# EAGLE board untitled (EAGLE 9.6.2)
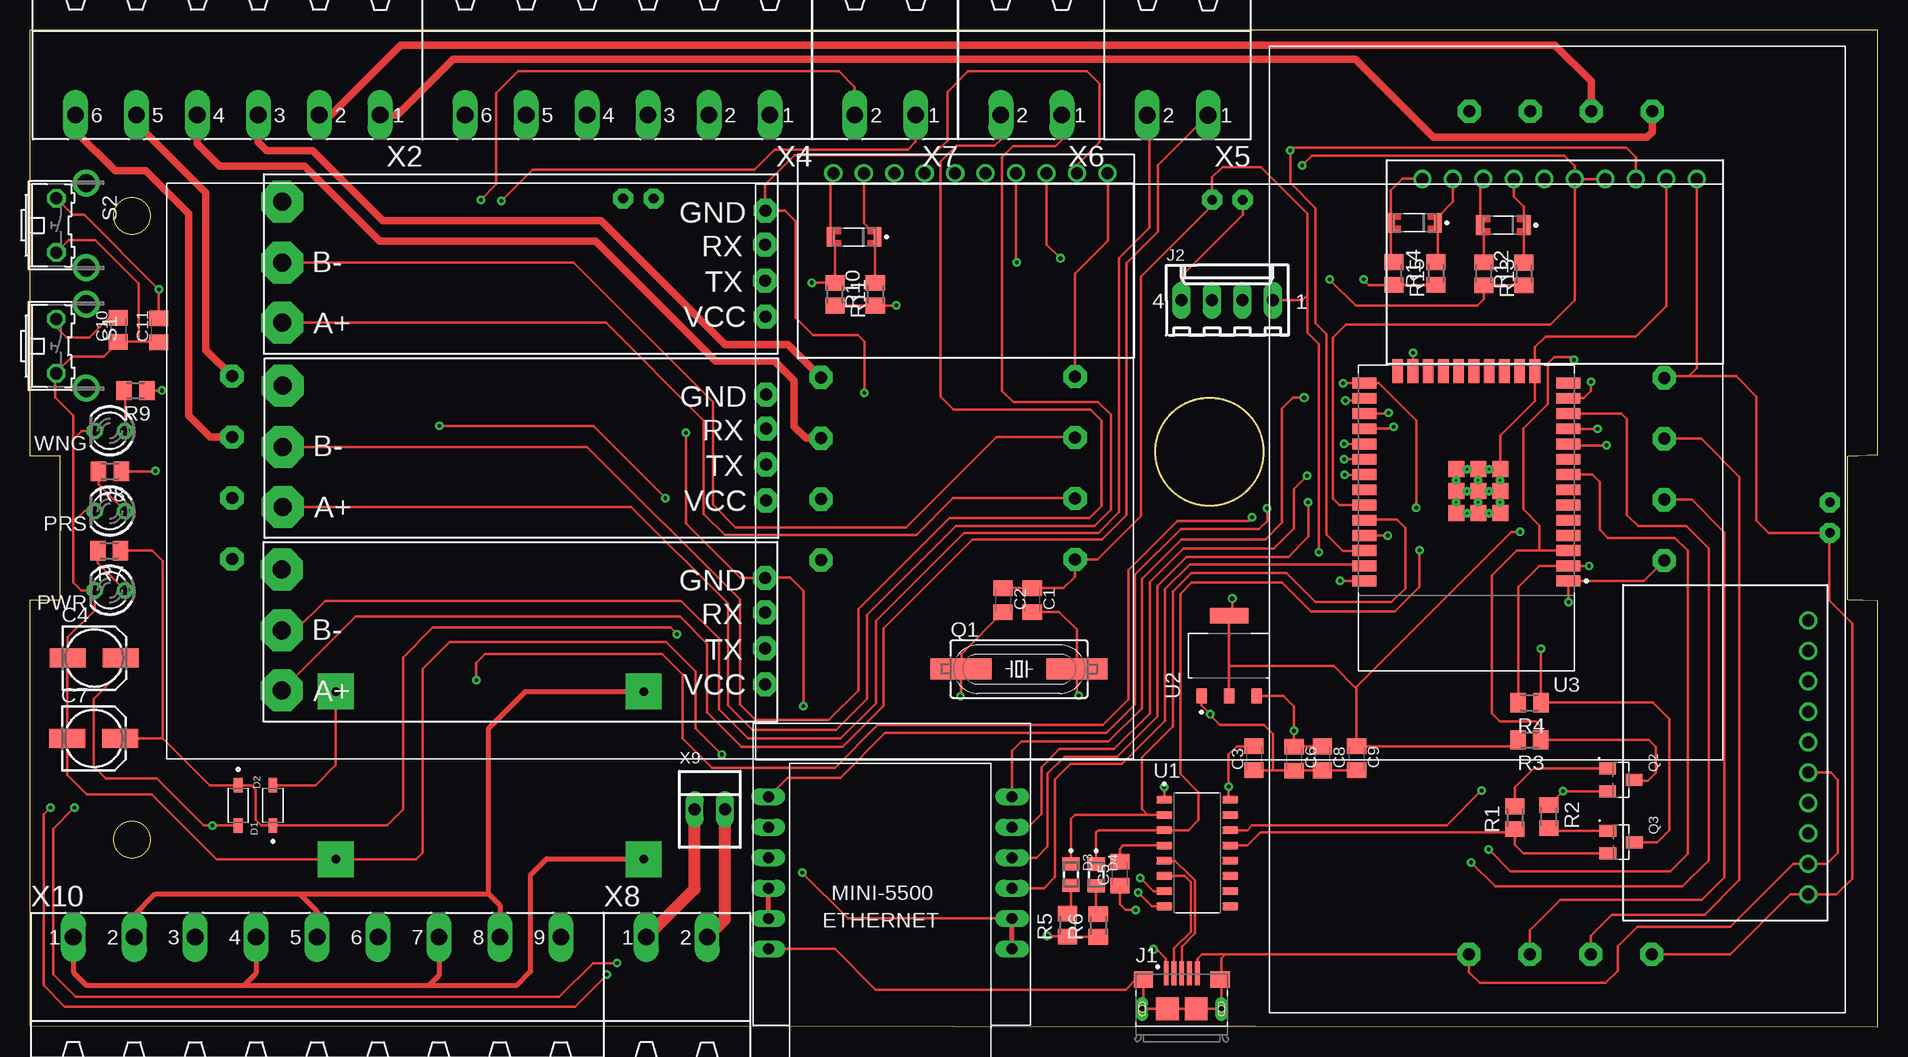
[diagram p0: board, top side]
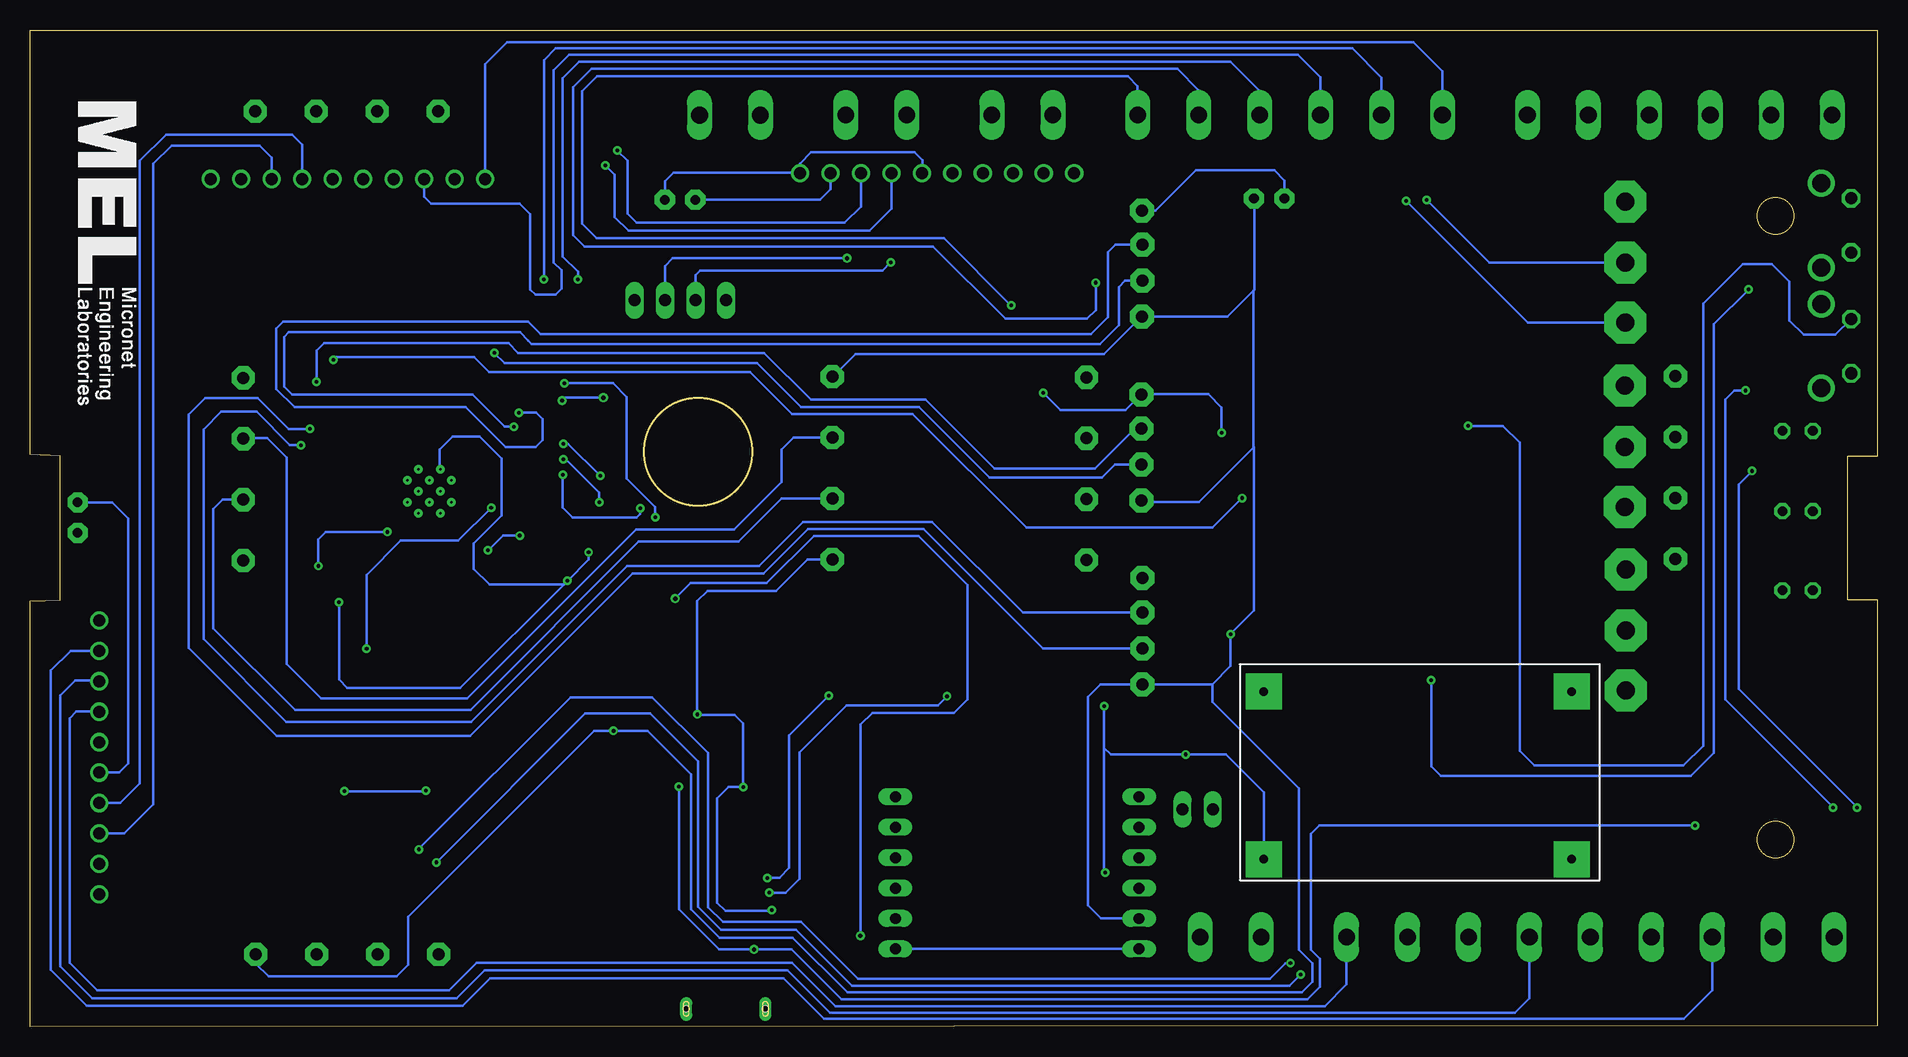
[diagram p1: board, bottom side, seen from below]

Size 154 x 83.1 mm. Coordinates in mm from the lower left corner, seen from the top.
Outline: 0,0.1 154,0 154,35.5 151.5,35.6 151.5,47.6 154,47.7 154,83.1 0,83.1 0,47.6 2.5,47.6 2.5,35.6 0,35.6 0,0.1
Outline: circle at 8.5,67.6 radius 1.5
Outline: circle at 8.5,15.6 radius 1.5
Outline: circle at 98.31,47.94 radius 4.5
Copper layers (1*16): Top 0.035mm / dielectric 1.5mm / Bottom 0.035mm
Design rules "default *": minimum track width 6mil, minimum drill 0.3mm, track to track 6mil, track to pad 6mil, pad to pad 6mil, via to via 6mil, smd to smd 6mil, copper to edge 40mil, drill to drill 6mil, minimum pad ring 10mil, minimum via ring 8mil, stop-mask expansion 4mil, vias tented up to drill 0mil, thermal gap 10mil

## Footprints (pad centres in the part's own frame; a part is rotated, then mirrored left to right if it is on the bottom)
ADS1115 = drill 1: A0 -6.35,-1.27; A1 -6.35,-3.81; A2 -6.35,-6.35; A3 -6.35,-8.89; ADDR -6.35,3.81; ALRT -6.35,1.27; GND -6.35,11.43; SCL -6.35,8.89; SDA -6.35,6.35; VDD -6.35,13.97
C0805K = smd 1.3 x 1.6: 1 -1,0; 2 1,0
153CLV-0505 = smd 3 x 1.6: + 2.2,0; - -2.2,0
SOD3715X145N = smd 1.21 x 0.73: A 1.68,0; C -1.68,0
LEDC2012X120N = smd 1.1 x 1.45: A 0.9,0; C -0.9,0
FCI_10118193-0001LF = smd 0.4 x 2: 1 -1.3,2.975; 2 -0.65,2.975; 3 0,2.975; 4 0.65,2.975; 5 1.3,2.975 | smd 1.6 x 1.4: S1 -3.2,2.45; S2 3.2,2.45 | smd 1.9 x 1.9: S3 1.2,0; S4 -1.2,0 | drill 0.5 pad 0.9 long: S5 -3.3,0; S6 3.3,0 | hole 0.5: -3.3,0; 3.3,0
6410-04 = drill 1.016 long: 1 3.81,0; 2 1.27,0; 3 -1.27,0; 4 -3.81,0
MINI560 = drill 0.7 pad 3 square: IN+ 0,-1.27; IN- 0,-15.24; OUT+ 25.67,-1.27; OUT- 25.67,-15.24
LED3MM = drill 0.813 octagon: A -1.27,0; K 1.27,0
PZEM-DC = drill 1 pad 1.93 octagon: 5V -2.12,-30.87; A+ -2.12,-20.71; B- -2.12,-25.79; CT+ 68.16,-15.67; CT- 68.16,-20.75; GND -2.12,-15.63; VDC+ 68.16,-30.91; VDC- 68.16,-25.83 | drill 0.8 pad 1.676 octagon: GND1 35.56,-45.72; VCC1 33.02,-45.72
SM49 = smd 5.08 x 1.778: 1 -4.826,0; 2 4.826,0
SOT95P240X120-3N = smd 1 x 1.4: 1 -0.95,-1.1; 2 0.95,-1.1; 3 0,1.1
M0805 = smd 1.3 x 1.6: 1 -0.95,0; 2 0.95,0
B3F-31XX = drill 1.016 octagon: 1 -2.261,-1.245; 2 2.261,-1.245 | drill 1.499 pad 2.159: 3 -3.505,1.245; 4 3.505,1.245
TTL-RS485 = drill 1.5 pad 3.5 octagon: A -19.7,-6; B -19.7,-1; P$7 -19.7,4.1 | drill 1 pad 2 octagon: GND 20.6,3.37; RX 20.581,0.505; TX 20.583,-2.493; VCC 20.6,-5.47
SOIC127P600X180-16N = smd 1.31 x 0.62: 1 -2.75,4.445; 2 -2.75,3.175; 3 -2.75,1.905; 4 -2.75,0.635; 5 -2.75,-0.635; 6 -2.75,-1.905; 7 -2.75,-3.175; 8 -2.75,-4.445; 9 2.75,-4.445; 10 2.75,-3.175; 11 2.75,-1.905; 12 2.75,-0.635; 13 2.75,0.635; 14 2.75,1.905; 15 2.75,3.175; 16 2.75,4.445
SOT229P700X180-4N = smd 1.31 x 0.93: 1 -3.345,2.29; 2 -3.345,0; 3 -3.345,-2.29 | smd 1.31 x 3.24: 4 3.345,0
MODULE_ESP32-WROOM-32D = smd 2 x 0.9: 1 -8.5,5.26; 2 -8.5,3.99; 3 -8.5,2.72; 4 -8.5,1.45; 5 -8.5,0.18; 6 -8.5,-1.09; 7 -8.5,-2.36; 8 -8.5,-3.63; 9 -8.5,-4.9; 10 -8.5,-6.17; 11 -8.5,-7.44; 12 -8.5,-8.71; 13 -8.5,-9.98; 14 -8.5,-11.25; 25 8.5,-11.25; 26 8.5,-9.98; 27 8.5,-8.71; 28 8.5,-7.44; 29 8.5,-6.17; 30 8.5,-4.9; 31 8.5,-3.63; 32 8.5,-2.36; 33 8.5,-1.09; 34 8.5,0.18; 35 8.5,1.45; 36 8.5,2.72; 37 8.5,3.99; 38 8.5,5.26 | smd 0.9 x 2: 15 -5.715,-12.25; 16 -4.445,-12.25; 17 -3.175,-12.25; 18 -1.905,-12.25; 19 -0.635,-12.25; 20 0.635,-12.25; 21 1.905,-12.25; 22 3.175,-12.25; 23 4.445,-12.25; 24 5.715,-12.25 | smd 1.33 x 1.33: 39_1 -2.835,-0.405; 39_2 -1,-0.405; 39_3 0.835,-0.405; 39_4 -2.835,-2.24; 39_5 -1,-2.24; 39_6 0.835,-2.24; 39_7 -2.835,-4.075; 39_8 -1,-4.075; 39_9 0.835,-4.075 | drill 0.2 pad 0.3: 39_10 -1.917,-0.405; 39_11 -0.083,-0.405; 39_12 -2.835,-1.323; 39_13 -1,-1.323; 39_14 0.835,-1.323; 39_15 -1.917,-2.24; 39_16 -0.083,-2.24; 39_17 -2.835,-3.158; 39_18 -1,-3.158; 39_19 0.835,-3.158; 39_20 -1.917,-4.075; 39_21 -0.083,-4.075
MINI_W5500 = drill 0.914 long: 3V3 21.844,-8.89; 3V3.2 21.844,-11.43; CS 1.524,-16.51; GND 1.524,-6.35; GND.2 1.524,-8.89; GND.3 21.844,-6.35; INT 1.524,-19.05; MISO 21.844,-19.05; MOSI 1.524,-11.43; NC 21.844,-13.97; RST 21.844,-16.51; SCLK 1.524,-13.97
MSTBA6 = drill 1.397 long: 1 -12.7,5.08; 2 -7.62,5.08; 3 -2.54,5.08; 4 2.54,5.08; 5 7.62,5.08; 6 12.7,5.08
MSTBA2 = drill 1.397 long: 1 -2.54,5.08; 2 2.54,5.08
22-23-2021 = drill 1 long: 1 -1.27,0; 2 1.27,0
MSTBA9 = drill 1.397 long: 1 -20.32,5.08; 2 -15.24,5.08; 3 -10.16,5.08; 4 -5.08,5.08; 5 0,5.08; 6 5.08,5.08; 7 10.16,5.08; 8 15.24,5.08; 9 20.32,5.08
DIO_LL4148 = smd 0.6 x 1.65: A -1.95,0; K 1.95,0

## Placement (x,y rotation side)
ADS1  [ADS1115]  141.89,24.99 180 top
ADS2  [ADS1115]  75.85,64.82 270 top
ADS3  [ADS1115]  124.96,64.33 270 top
C1  22pF  [C0805K]  83.54,35.56 270 top
C2  22pF  [C0805K]  81.12,35.56 270 top
C3  1uF  [C0805K]  102.03,22.39 90 top
C4  10uF/16V  [153CLV-0505]  5.37,30.74 0 top
C5  100nF  [C0805K]  90.84,12.75 90 top
C6  1uF  [C0805K]  105.37,22.36 270 top
C7  10uF/16V  [153CLV-0505]  5.32,24.03 0 top
C8  1uF  [C0805K]  107.73,22.37 270 top
C9  1uF  [C0805K]  110.58,22.38 270 top
C10  100nF  [C0805K]  7.36,58.1 90 top
C11  100nF  [C0805K]  10.74,58.07 90 top
D1  1N5819HW-7  [SOD3715X145N]  20.25,18.45 90 top
D2  1N5819HW-7  [SOD3715X145N]  17.36,18.45 270 top
D3  SML-LXT0805IW-TR  [LEDC2012X120N]  86.77,12.69 270 top
D4  SML-LXT0805IW-TR  [LEDC2012X120N]  88.87,12.66 270 top
J1  10118193-0001LF  [FCI_10118193-0001LF]  96,1.49 0 top
J2  22-27-2041-04  [6410-04]  99.8,60.57 0 top
MINI1  [MINI560]  51.15,29.21 0 bottom
PRS  TLLY4400  [LED3MM]  6.66,42.98 180 top
PWR  TLLY4400  [LED3MM]  6.66,36.38 180 top
PZEM-DC1  [PZEM-DC]  104.31,8.16 90 top
PZEM-DC2  [PZEM-DC]  134.1,23.23 180 top
PZEM-DC3  [PZEM-DC]  85,23.33 180 top
Q1  12MHz  [SM49]  82.44,29.83 0 top
Q2  MMBT3904  [SOT95P240X120-3N]  132.61,20.59 270 top
Q3  MMBT3904  [SOT95P240X120-3N]  132.63,15.39 270 top
R1  10k  [M0805]  123.76,17.42 90 top
R2  10k  [M0805]  126.6,17.51 270 top
R3  10k  [M0805]  124.98,23.92 180 top
R4  10k  [M0805]  125,27.02 180 top
R5  330  [M0805]  86.48,8.47 90 top
R6  330  [M0805]  89.05,8.45 90 top
R7  330  [M0805]  6.61,39.68 180 top
R8  330  [M0805]  6.67,46.31 180 top
R9  330  [M0805]  8.8,53.05 180 top
R10  100  [M0805]  70.45,61.07 90 top
R11  160  [M0805]  67.1,61.07 270 top
R12  100  [M0805]  124.52,62.75 90 top
R13  160  [M0805]  121.19,62.77 270 top
R14  100  [M0805]  117.19,62.8 90 top
R15  160  [M0805]  113.69,62.8 270 top
S1  [B3F-31XX]  3.44,56.74 270 top
S2  [B3F-31XX]  3.44,66.81 270 top
TTL-RS1  [TTL-RS485]  40.7,64.69 0 top
TTL-RS2  [TTL-RS485]  40.77,49.35 0 top
TTL-RS3  [TTL-RS485]  40.69,34.02 0 top
U1  CH340G  [SOIC127P600X180-16N]  97.3,14.48 0 top
U2  AMS1117  [SOT229P700X180-4N]  99.94,30.93 90 top
U3  ESP32-WROOM-32D  [MODULE_ESP32-WROOM-32D]  119.72,42.41 180 top
U$1  MINI_W5500  [MINI_W5500]  83.39,0.13 180 top
WNG  TLLY4400  [LED3MM]  6.66,49.68 180 top
X2  MSTBA6  [MSTBA6]  16.49,81.09 180 top
X4  MSTBA6  [MSTBA6]  48.97,81.09 180 top
X5  MSTBA2  [MSTBA2]  95.66,81.08 180 top
X6  MSTBA2  [MSTBA2]  83.46,81.1 180 top
X7  MSTBA2  [MSTBA2]  71.29,81.09 180 top
X8  MSTBA2  [MSTBA2]  53.91,2.39 0 top
X9  22-23-2021  [22-23-2021]  56.67,18.12 0 top
X10  MSTBA9  [MSTBA9]  23.93,2.39 0 top
ZENER3V1  3v3  [DIO_LL4148]  68.7,65.85 0 top
ZENER3V2  [DIO_LL4148]  122.83,66.83 0 top
ZENER3V3  [DIO_LL4148]  115.4,67.02 0 top

## Library data of the parts
ADS1-ADS3 = ds1115
C1-C11 = rcl; SPICEPREFIX: C
D1 D2 = 1N5819HW-7; AVAILABILITY: In Stock; DESCRIPTION: Diode Schottky 40 V 1A Surface Mount SOD-123; MF: Diodes Inc.; MP: 1N5819HW-7; PACKAGE: SOD-123 Fairchild Semiconductor; PRICE: None; PURCHASE-URL: https://pricing.snapeda.com/search/part/1N5819HW-7/?ref=eda
D3 D4 = SML-LXT0805IW-TR; AVAILABILITY: In Stock; DESCRIPTION: Red - LED Indication - Discrete 2V 0805 (2012 Metric); MF: Lumex Opto/Components; MP: SML-LXT0805IW-TR; PACKAGE: 0805 Lumex; PRICE: None; PURCHASE-URL: https://pricing.snapeda.com/search/part/SML-LXT0805IW-TR/?ref=eda
J1 = 10118193-0001LF; AVAILABILITY: In Stock; DESCRIPTION: USB - micro B USB 2.0 Receptacle Connector 5 Position Surface Mount, Right Angle; Through Hole; MF: FCI; MP: 10118193-0001LF; PACKAGE: None; PRICE: None; PURCHASE-URL: https://pricing.snapeda.com/search/part/10118193-0001LF/?ref=eda
J2 = con-molex; MF: MOLEX; OC_FARNELL: unknown; OC_NEWARK: unknown
MINI1 = MINI560
PRS PWR WNG = led; MF: VISHAY SEMICONDUCTOR; OC_FARNELL: 1612439
PZEM-DC1-PZEM-DC3 = pzem-dc
Q1 = crystal; OC_FARNELL: unknown; OC_NEWARK: unknown
Q2 Q3 = MMBT3904; AVAILABILITY: In Stock; DESCRIPTION: Bipolar (BJT) Transistor NPN 40 V 200 mA 300MHz 300 mW Surface Mount SOT-23-3 (TO-236); MF: ON Semiconductor; MP: MMBT3904; PACKAGE: SOT-23-3 Motorola; PRICE: None
R1-R15 = rcl; SPICEPREFIX: R
S1 S2 = switch-omron; MPN: B3F-3100; OC_FARNELL: 959704; OC_NEWARK: 36M3582
TTL-RS1-TTL-RS3 = TTL-RS485
U1 = CH340G; AVAILABILITY: Not in stock; DESCRIPTION: USB Interface Integrated Circuit; MF: WCH; MP: Ch340G; PACKAGE: None; PRICE: None
U2 = AMS1117; AVAILABILITY: Not in stock; DESCRIPTION: 1A LOW DROPOUT VOLTAGE REGULATOR SOT-223; MF: Advanced Monolithic Systems; MP: AMS1117; PACKAGE: SOT-223 Seeed Technology; PRICE: None
U3 = ESP32-WROOM-32D; AVAILABILITY: In Stock; DESCRIPTION: Bluetooth, WiFi 802.11b/g/n, Bluetooth v4.2 +EDR, Class 1, 2 and 3 Transceiver Module 2.4GHz ~ 2.5GHz Integrated; MF: Espressif Systems; MP: ESP32-WROOM-32D; PACKAGE: Module Espressif Systems; PRICE: None; PURCHASE-URL: https://pricing.snapeda.com/search/part/ESP32-WROOM-32D/?ref=eda
U$1 = ethernet-mikroavr
X2 X4 = con-phoenix-508; MF: FARNELL; MPN: 1757284; OC_FARNELL: 3705213; OC_NEWARK: 71C4165
X5-X8 = con-phoenix-508; MF: FARNELL; MPN: 1757242; OC_FARNELL: 3705171; OC_NEWARK: 71C4161
X9 = con-molex; MF: MOLEX; MPN: 22-23-2021; OC_FARNELL: 1462926; OC_NEWARK: 25C3832
X10 = con-phoenix-508; MF: FARNELL; MPN: 1757310; OC_FARNELL: 3705237; OC_NEWARK: 71C4167
ZENER3V1-ZENER3V3 = ZENER3V3

## Nets
+12V: MINI1.IN+ X10.2 X10.5 X10.8
A0: ADS1.A2 X10.3
A1: ADS1.A1 X10.6
A2: ADS1.A0 X10.9
A3+: ADS2.A2 R10.2 ZENER3V1.K
A3-: ADS2.A3 R11.1 X4.2 ZENER3V1.A
A4+: ADS3.A0 R12.2 ZENER3V2.K
A4-: ADS3.A1 R13.1 X4.4 ZENER3V2.A
A5+: ADS3.A2 R14.2 ZENER3V3.K
A5-: ADS3.A3 R15.1 X4.6 ZENER3V3.A
A_PZEM: PZEM-DC1.A+ PZEM-DC2.A+ PZEM-DC3.A+ TTL-RS1.A X7.1
B_PZEM: PZEM-DC1.B- PZEM-DC2.B- PZEM-DC3.B- TTL-RS1.B X7.2
DTR: Q3.2 R1.1 U1.13
EN: C10.2 Q2.3 R3.1 S1.1 U3.3
GND: ADS1.ADDR ADS1.GND ADS2.GND ADS3.GND C1.1 C2.1 C3.1 C4.- C5.1 C6.2 C7.- C8.2 C9.2 C10.1 C11.1 J1.5 J1.S1 J1.S2 J1.S3 J1.S4 J1.S5 J1.S6 J2.1 MINI1.IN- MINI1.OUT- PRS.K PWR.K PZEM-DC1.GND PZEM-DC1.GND1 PZEM-DC2.GND PZEM-DC2.GND1 PZEM-DC3.GND PZEM-DC3.GND1 S1.2 S2.2 TTL-RS1.GND TTL-RS2.GND TTL-RS3.GND U1.1 U2.1 U3.1 U3.15 U3.38 U3.39_1 U3.39_2 U3.39_3 U3.39_4 U3.39_5 U3.39_6 U3.39_7 U3.39_8 U3.39_9 U3.39_10 U3.39_11 U3.39_12 U3.39_13 U3.39_14 U3.39_15 U3.39_16 U3.39_17 U3.39_18 U3.39_19 U3.39_20 U3.39_21 U$1.GND U$1.GND.2 U$1.GND.3 WNG.K X10.1 X10.4 X10.7
INT_LAN: U3.26 U$1.INT
IO0: C11.2 Q3.3 R4.1 S2.1 U3.25
LED_PROSES: R8.1 U3.12
LED_WARNING: R9.1 U3.8
MISO_VSPI: U3.31 U$1.MISO
MOSI_VSPI: U3.37 U$1.MOSI
N$1: C1.2 Q1.2 U1.7
N$2: C2.2 Q1.1 U1.8
N$4: C5.2 U1.4
N$6: Q2.1 R1.2
N$7: Q3.1 R2.2
N$8: D1.A MINI1.OUT+
N$9: R10.1 R11.2 X4.1
N$10: D3.A R5.2
N$11: D4.A R6.2
N$12: PWR.A R7.2
N$13: PRS.A R8.2
N$14: R9.2 WNG.A
N$15: TTL-RS2.A X6.1
N$16: TTL-RS2.B X6.2
N$17: X8.1 X9.1
N$18: X8.2 X9.2
N$21: R12.1 R13.2 X4.3
N$22: TTL-RS3.A X5.1
N$23: TTL-RS3.B X5.2
N$24: R14.1 R15.2 X4.5
OUT+: ADS1.VDD ADS2.ADDR ADS2.VDD ADS3.VDD C6.1 C7.+ C8.1 D1.C D2.C J2.4 PZEM-DC1.5V PZEM-DC1.VCC1 PZEM-DC2.5V PZEM-DC2.VCC1 PZEM-DC3.5V PZEM-DC3.VCC1 R7.1 TTL-RS1.VCC TTL-RS2.VCC TTL-RS3.VCC U2.3 U$1.3V3 U$1.3V3.2
RTS: Q2.2 R2.1 U1.14
RX: D4.C U1.3 U3.35
RX1: TTL-RS2.RX U3.13
RX2: TTL-RS3.RX U3.10
RX_PZEM: TTL-RS1.RX U3.27
SCK_VSPI: U3.30 U$1.SCLK
SCL: ADS1.SCL ADS2.SCL ADS3.SCL J2.2 U3.36
SDA: ADS1.SDA ADS2.SDA ADS3.ADDR ADS3.SDA J2.3 U3.33
SS_LAN: U3.29 U$1.CS
TX: D3.C U1.2 U3.34
TX1: TTL-RS2.TX U3.23
TX2: TTL-RS3.TX U3.11
TX_PZEM: TTL-RS1.TX U3.28
USB_N: J1.2 U1.6
USB_P: J1.3 U1.5
VCC: C9.1 R3.2 R4.2 R5.1 R6.1 U2.2 U2.4 U3.2
VOLT1+: PZEM-DC1.VDC+ X2.1
VOLT1-: PZEM-DC1.VDC- X2.2
VOLT2+: PZEM-DC2.VDC+ X2.3
VOLT2-: PZEM-DC2.VDC- X2.4
VOLT3+: PZEM-DC3.VDC+ X2.5
VOLT3-: PZEM-DC3.VDC- X2.6
VUSB: C3.2 C4.+ D2.A J1.1 U1.16

## Tracks (layer width: path | path; a pad name or v marks a point on that pad's centre or on a via)
+12V
  Top 0.406: X10.2 8.69,9.3 10.45,11.06 22.48,11.06 | X10.5 23.93,9.61 22.48,11.06 | 22.48,11.06 38.23,11.06 | 38.23,11.06 39.18,10.1 39.18,7.48 X10.8 | 38.23,11.06 38.23,24.87 41.3,27.94 MINI1.IN+
A0
  Bottom 0.203: X10.3 13.77,3.04 16.16,0.65 87.82,0.65 91.19,4.02 115.65,4.02 117.93,1.74 149.26,1.74 152.27,4.75 152.27,29.7 150.62,31.34 ADS1.A2
A1
  Bottom 0.203: X10.6 29.01,2.37 30.22,1.16 87.3,1.16 90.83,4.69 116.12,4.69 118.43,2.38 148.81,2.38 151.49,5.05 151.49,27.61 150.23,28.87 148.3,28.87 ADS1.A1
A2
  Bottom 0.203: X10.9 44.25,3.53 46.07,1.7 86.84,1.7 90.48,5.35 116.76,5.35 119.08,3.03 148.39,3.03 150.69,5.33 150.69,25.72 150.14,26.27 ADS1.A0
A3+
  Top 0.2: R10.2 70.45,65.65 ZENER3V1.K 69.5,66.99 ADS2.A2
A3-  (via drill 0.3)
  Top 0.2: R11.1 67.1,65.49 ZENER3V1.A 66.75,70.95 ADS2.A3
  Top 0.203: v65.16,62.04 65.18,62.02 R11.1
  Bottom 0.203: X4.2 56.59,78.08 58.37,79.86 107.18,79.86 108.71,78.33 108.71,65.99 107.78,65.06 78.73,65.06 72.7,59.03 65.88,59.03 65.16,59.75 v65.16,62.03 v65.16,62.04
A4+
  Top 0.2: R12.2 124.52,68.38 123.69,69.2 ADS3.A0
  Top 0.203: R12.2 124.52,66.56 ZENER3V2.K
A4-
  Top 0.2: ADS3.A1 120.88,70.41 ZENER3V2.A 121.19,66.52 R13.1
  Bottom 0.203: ADS3.A1 121.15,69.19 120.56,68.6 113.17,68.6 112.3,67.73 112.3,61.47 111.85,61.02 110.19,61.02 109.7,61.52 109.7,63.07 110.33,63.7 110.33,79.76 109.05,81.04 48.3,81.04 46.43,79.17 X4.4
A5+
  Top 0.2: R14.2 117.35,63.9 ZENER3V3.K 117.35,67.51 118.61,68.77 ADS3.A2
A5-
  Top 0.2: R15.1 113.45,63.99 ZENER3V3.A 113.45,69.75 114.39,70.69 116.06,70.69 ADS3.A3
  Bottom 0.203: ADS3.A3 116.07,80.24 114.22,82.09 38.68,82.09 36.27,79.68 X4.6
A_PZEM  (via drill 0.3)
  Top 0.2: PZEM-DC1.A+ 125.02,8.04 127.55,10.57 139.35,10.57 141.23,12.45 141.23,41.22 138.51,43.94 PZEM-DC2.A+ | TTL-RS1.A 48.02,58.69 56.17,50.54 56.17,42.75 57.92,40.99 73.88,40.99 76.95,44.06 87.1,44.06 PZEM-DC3.A+
  Top 0.203: X7.1 73.83,73.78 73.18,73.13 62.06,73.13 60.39,71.46 41.9,71.46 v39.3,68.86
  Bottom 0.203: v39.3,68.86 29.13,58.69 TTL-RS1.A | PZEM-DC3.A+ 91.34,44.04 94.94,40.44 103.27,40.44 117.29,26.41 131.91,26.41 138.72,33.22 138.72,43.16 137.94,43.94 PZEM-DC2.A+
B_PZEM  (via drill 0.3)
  Top 0.2: PZEM-DC1.B- 130.1,7.59 131.85,9.34 139.6,9.34 142.48,12.22 142.48,45.85 139.31,49.02 PZEM-DC2.B- | TTL-RS1.B 45.32,63.69 56.92,52.08 56.92,43.54 58.83,41.63 73.02,41.63 80.55,49.16 87.07,49.16 PZEM-DC3.B-
  Top 0.203: X7.2 68.75,78.32 67.42,79.65 40.67,79.65 38.87,77.85 38.87,70.23 v37.6,68.95
  Bottom 0.203: v37.6,68.95 32.33,63.69 TTL-RS1.B | PZEM-DC3.B- 90.35,49.12 91.34,48.13 91.34,45.41 95.3,41.46 103.48,41.46 117.55,27.39 129.74,27.39 132.59,30.23 132.59,47.43 134.21,49.06 136.18,49.06 PZEM-DC2.B-
DTR
  Top 0.2: Q3.2 124.47,14.44 | U1.13 101.47,15.12 102.55,16.2 123.76,16.2
  Top 0.203: 123.76,16.2 R1.1 123.76,15.14 124.47,14.44
EN  (via drill 0.3)
  Top 0.2: Q2.3 133.78,20.51 134.87,20.51 135.52,21.16 135.52,23.33 134.93,23.92 R3.1 125.93,25.05 125.53,25.45 122.54,25.45 121.86,26.14 121.86,37.63 123.92,39.69 125.83,39.69 U3.3
  Top 0.203: S1.1 2.2,58.35 3.08,57.47 4.95,57.47 6.59,59.1 C10.2 | 125.83,39.69 125.83,41.81 124.48,43.15 124.48,49.86 126.52,51.91 126.52,55.28 127.06,55.82 128.51,55.82 v128.72,55.6 | v52.97,44.08 46.96,50.09 v34.12,50.09
  Bottom 0.203: v128.72,55.6 128.48,55.85 116.98,55.85 115.73,54.59 94,54.59 90.5,51.1 80.43,51.1 70.94,41.6 55.44,41.6 v52.97,44.08 | v34.12,50.09 31.21,50.09 29.82,48.69 29.82,23.01 28.6,21.79 16.17,21.79 14.54,23.42 14.54,60.28 11.23,63.59 8.82,63.59 7.34,62.12 7.34,58.87 6.17,57.69 3.51,57.69 S1.1
GND  (via drill 0.3)
  Top 0.2: v92.17,9.74 91.33,9.74 | J1.S5 J1.S4 J1.S3 J1.S6 | J1.S6 99.3,3.84 J1.S2 | MINI1.OUT- 15.54,13.97 10.14,19.37 4.71,19.37 3.09,21 3.09,24.01 C7.- 3.12,30.69 C4.- 3.17,32.5 5.39,34.72 PWR.K 4.29,36.38 3.62,37.05 3.62,42.04 | PRS.K 4.55,42.98 3.62,42.04 | 3.62,42.04 3.62,48.97 | WNG.K 4.32,49.68 3.62,48.97 | 3.62,48.97 3.62,50.94 2.11,52.45 2.11,54.39 S1.2 2.2,54.56 3.5,55.87 6.13,55.87 C10.1 9.06,57.1 10.7,57.1 C11.1 | C2.1 C1.1 | C1.1 | C3.1 103.6,21.39 | 103.6,21.39 105.34,21.39 C6.2 107.71,21.36 C8.2 C9.2 | 103.6,21.39 103.6,24.43 102.87,25.17 99.17,25.17 | U3.1 134.51,37.15 PZEM-DC2.GND | C1.1 | 87.12,37.51 PZEM-DC3.GND | ADS1.GND 148.82,13.56 149.77,13.56 150.7,14.5 150.7,20.6 150.1,21.21 148.26,21.21 ADS1.ADDR | PZEM-DC1.GND 99.95,6.04 99.65,6.04 99.3,5.68 J1.S6
  Top 0.203: ADS3.GND 136.39,60.09 133.85,57.55 126.33,57.55 125.43,56.65 U3.15 125.43,52.17 122.56,49.3 U3.39_7 | C1.1 86.16,36.56 87.12,37.51 | 99.17,25.17 98.38,25.96 v98.38,26.04 97.65,26.77 U2.1 | ADS2.GND 87.28,71.85 89.17,73.73 89.17,78.6 88.12,79.65 78.2,79.65 76.46,77.9 76.46,73.87 75.24,72.65 63.71,72.65 61.25,70.19 61.25,68.11 TTL-RS1.GND 62.94,68.06 63.83,67.16 63.83,59.11 65.26,57.68 69,57.68 69.54,57.14 v69.54,52.86 | U$1.GND.3 67.1,6.48 70.49,3.09 91.35,3.09 92.2,3.94 J1.S1 92.8,1.59 J1.S5 | 9.06,57.1 9.06,61.94 5.43,65.56 3.21,65.56 S2.2 | PZEM-DC1.GND 119.94,4.54 120.83,3.64 131.33,3.64 132.35,4.66 132.35,6.69 134,8.33 141.73,8.33 146.96,13.56 148.82,13.56 | PZEM-DC3.GND 88.99,38.96 92.61,42.58 92.61,62.54 98.54,68.47 PZEM-DC2.GND1 98.54,70.84 99.38,71.68 102.6,71.68 106.48,67.8 106.48,60.99 | 106.48,60.99 106.48,57.86 107.44,56.9 v107.44,39.55 | v109.19,37.18 109.22,37.15 U3.38 | U3.1 128.24,37.13 v128.24,35.4 | U$1.GND.2 68.2,9.02 v64.37,12.85 | v64.47,26.72 64.47,36.32 63.34,37.44 61.34,37.44 TTL-RS3.GND 59.24,37.39 54.67,41.96 v54.67,49.51 | MINI1.OUT- 32.17,13.97 32.71,14.51 32.71,29.81 34.96,32.06 53.02,32.06 55.47,29.61 55.47,24.89 v57.65,22.7 | J2.1 106.05,60.57 106.48,60.99 | J1.5 97.3,5.65 97.7,6.05 99.94,6.05 99.95,6.04 | v94.56,19.99 U1.1 | 91.33,9.74 90.84,10.22 C5.1
  Top 0.406: U$1.GND U$1.GND.2 | 120.78,46.49 U3.39_20 U3.39_7 U3.39_17 U3.39_4 122.5,44.65 | 120.78,46.49 U3.39_8 U3.39_21 U3.39_9 U3.39_19 118.88,44.7 | 120.78,46.49 120.72,46.43 U3.39_18 U3.39_5 | 118.88,44.7 U3.39_6 | 118.93,44.65 U3.39_16 U3.39_5 | 118.93,44.65 118.88,44.7 | U3.39_5 U3.39_15 122.5,44.65 | 122.5,44.65 122.5,43.79 U3.39_12 U3.39_1 U3.39_10 U3.39_2 | U3.39_5 U3.39_13 U3.39_2 | 118.93,44.65 118.88,44.61 U3.39_14 U3.39_3 U3.39_11 U3.39_2 | 17.85,3.47 4.69,3.47 3.61,4.54 X10.1 | 17.85,3.47 18.85,4.47 X10.4 | 17.85,3.47 33.25,3.47 | 33.25,3.47 34.13,4.35 34.13,7.43 X10.7 | 33.25,3.47 40.6,3.47 41.74,4.6 41.74,12.67 43.07,14.01 51.12,14.01 MINI1.IN-
  Bottom 0.203: TTL-RS1.GND 60.18,68.06 56.82,71.41 50.29,71.41 49.43,70.56 PZEM-DC3.GND1 | PZEM-DC2.GND1 88.16,68.95 87.28,69.83 ADS2.GND | U$1.GND U$1.GND.3 | v92.17,9.74 92.26,9.65 96.03,9.65 96.72,10.33 96.72,19.05 95.78,19.99 v94.56,19.99 94.56,25.29 95.28,26.02 98.35,26.02 v98.38,26.04 98.38,35.48 97.54,36.32 91.81,36.32 89.17,38.96 PZEM-DC3.GND | ADS1.ADDR 146.55,21.18 145.79,21.94 145.79,42.37 147.15,43.72 PZEM-DC1.GND1 | v107.44,39.55 107.44,38.93 v109.19,37.18 | v109.19,37.18 109.5,36.87 115.7,36.87 117.01,38.18 117.01,40.3 114.69,42.62 114.69,47.37 116.51,49.19 118.78,49.19 119.86,48.11 119.86,46.54 U3.39_21 | v128.24,35.4 128.24,28.94 127.54,28.24 118.13,28.24 v109.19,37.18 | 64.47,23.26 64.47,12.94 v64.37,12.85 | v54.67,49.51 54.67,51.63 55.77,52.73 TTL-RS2.GND 62.68,51.41 68.09,51.41 v69.54,52.86 | 64.47,23.26 63.91,22.7 v57.65,22.7 54.3,22.7 51.15,19.56 MINI1.IN- | 64.47,23.26 v64.47,26.72
INT_LAN  (via drill 0.35)
  Top 0.203: v106.21,52.44 105.27,52.44 104.36,51.53 104.36,42.02 102.98,40.64 95.99,40.64 92.68,37.33 92.68,26.55 89.91,23.78 82.65,23.78 81.87,23 U$1.INT | v109.63,52.19 111.02,52.19 U3.26
  Bottom 0.203: v106.21,52.44 109.39,52.44 v109.63,52.19
IO0  (via drill 0.3)
  Top 0.2: R4.1 135.28,27.02 136.63,25.67 136.63,16.37 135.65,15.39 Q3.3 | C11.2 v10.74,61.47 4.52,67.69 3.58,67.69 S2.1
  Top 0.203: R4.1 125.95,31.52 v125.94,31.53 | v109.47,53.64 111.2,53.64 U3.25 112.42,53.66 115.56,50.52 v115.56,43.25 | v37.21,28.88 37.21,30.35 37.94,31.08 52.69,31.08 54.41,29.36 54.41,24.04 56.85,21.6 67.1,21.6 70.66,25.16 89.45,25.16 91.56,27.27 91.56,38.08 95.65,42.17 101.6,42.17 v101.89,42.46
  Bottom 0.203: v125.94,31.53 125.94,37.67 123.1,40.52 118.29,40.52 v115.56,43.25 | v109.47,53.64 105.41,53.64 104.25,52.48 104.25,45.69 101.89,43.33 v101.89,42.46 | v37.21,28.88 37.21,21.71 36.41,20.91 15.55,20.91 13.63,22.82 13.63,58.58 v10.74,61.47
LED_PROSES  (via drill 0.3)
  Top 0.203: U3.12 132.66,51.12 133.11,50.67 133.11,42.68 134.05,41.74 138.06,41.74 139.94,39.87 139.94,13.89 137.74,11.69 122.14,11.69 v120.12,13.7 | v1.7,18.28 1.14,17.71 1.14,3.44 2.91,1.67 45.42,1.67 v48.09,4.34 | v10.45,46.33 10.43,46.31 R8.1
  Bottom 0.203: v120.12,13.7 107.71,26.11 102.3,26.11 98.31,22.12 98.31,9.99 96.4,8.09 90.14,8.09 85.47,3.42 49.01,3.42 v48.09,4.34 | v1.7,18.28 11.58,28.15 11.58,45.21 v10.45,46.33
LED_WARNING  (via drill 0.3)
  Top 0.203: U3.8 130.24,46.04 130.87,45.42 130.87,41.44 131.54,40.77 137.12,40.77 138.18,39.71 138.18,14.39 136.75,12.96 123.42,12.96 v121.59,14.79 | v3.7,18.27 1.92,16.49 1.92,4.36 3.8,2.48 44.11,2.48 46.93,5.3 v48.94,5.3 | v11,53.04 R9.1
  Bottom 0.203: v121.59,14.79 121.59,14.81 108.93,27.47 102.13,27.47 97.49,22.83 97.49,9.97 96.25,8.74 89.73,8.74 84.99,4 50.66,4 49.36,5.3 v48.94,5.3 | v3.7,18.27 12.7,27.27 12.7,52.27 11.93,53.04 v11,53.04
MISO_VSPI  (via drill 0.3)
  Top 0.203: U$1.MISO 63.13,20.76 67.54,20.76 71.29,24.51 89.73,24.51 92.1,26.88 92.1,37.69 95.92,41.51 102.46,41.51 103.13,42.18 v103.13,43.24 | v109.59,46.01 111.19,46.01 U3.31
  Bottom 0.203: v109.59,46.01 109.59,43.27 108.79,42.47 103.43,42.47 103.13,42.76 v103.13,43.24
MOSI_VSPI
  Top 0.203: U3.37 111.1,38.54 96.67,38.54 94.61,36.48 94.61,25.49 91.01,21.89 86.73,21.89 85.45,20.61 85.45,12.5 84.5,11.56 U$1.MOSI
N$1  (via drill 0.3)
  Top 0.2: 87.27,33.1 85.78,34.58 83.57,34.58 C1.2
  Top 0.203: 87.28,27.74 v87.41,27.6 87.27,27.75 Q1.2 | Q1.2 | U1.7 93.64,11.31 v92.55,12.4 | 87.27,33.1 87.27,29.96 Q1.2
  Bottom 0.203: v87.41,27.6 90.71,24.3 90.71,13.23 91.54,12.4 v92.55,12.4
N$2  (via drill 0.3)
  Top 0.2: 77.62,31.06 77.63,31.07 C2.2
  Top 0.203: U1.8 93.53,10.04 v92.38,11.18 | v77.56,27.54 77.54,27.56 | 77.54,27.56 77.54,27.57 | 77.54,29.75 Q1.1 | Q1.1 77.63,31.07 | Q1.1 77.62,27.64 77.54,27.56
  Bottom 0.203: v77.56,27.54 78.3,26.81 85.92,26.81 89.86,22.87 89.86,12.33 91.01,11.18 v92.38,11.18
N$4
  Top 0.2: 91.12,15.12 U1.4
  Top 0.203: C5.2 90.84,14.84 91.12,15.12
N$6
  Top 0.2: Q2.1 125.37,21.54 123.76,19.93 R1.2
N$7
  Top 0.2: Q3.1 127.3,16.34 127.07,16.56 R2.2
N$8
  Top 0.2: D1.A 23.79,20.13 25.48,21.82 MINI1.OUT+
N$9  (via drill 0.3)
  Top 0.2: R11.2 R10.1
  Top 0.203: R10.1 72.2,60.12 v72.21,60.13
  Bottom 0.203: v72.21,60.13 77.83,65.75 106.76,65.75 107.98,66.96 107.98,78 106.75,79.23 62.47,79.23 61.67,78.43 X4.1
N$10
  Top 0.203: D3.A 86.77,9.71 R5.2
N$11
  Top 0.203: R6.2 88.87,9.58 D4.A
N$12
  Top 0.2: PWR.A 5.65,38.65 R7.2
N$13
  Top 0.2: PRS.A 5.72,45.19 R8.2
N$14
  Top 0.203: WNG.A 7.93,52.97 R9.2
N$15
  Top 0.2: TTL-RS2.A 50.12,43.35 58.19,35.28 58.19,26.78 60.22,24.75 67.2,24.75 69.78,27.34 69.78,34.33 77.21,41.76 88.73,41.76 90.09,43.12 90.09,51.02 89.03,52.08 81.97,52.08
  Top 0.203: X6.1 86,73.93 85.46,73.39 81.95,73.39 81.04,72.48 81.04,53.01 81.97,52.08
N$16
  Top 0.2: TTL-RS2.B 46.45,48.35 59.19,35.61 59.19,26.86 60.49,25.56 66.58,25.56 69.05,28.03 69.05,34.82 76.64,42.41 88.32,42.41 89.33,43.42 89.33,50.53 88.41,51.45 76.98,51.45
  Top 0.203: X6.2 80.92,73.97 80.42,73.46 77.23,73.46 75.88,72.11 75.88,52.54 76.98,51.45
N$17
  Top 1.016: X8.1 55.4,11.49 X9.1
N$18
  Top 1.016: X8.2 57.94,8.95 X9.2
N$21  (via drill 0.3)
  Top 0.2: R13.2 124.5,61.82 R12.1
  Top 0.203: R13.2 121.19,60.66 120.64,60.11 110.52,60.11 v108.33,62.29
  Bottom 0.203: v108.33,62.29 108.33,62.96 109.59,64.22 109.59,79.08 108.22,80.45 53.92,80.45 51.51,78.04 X4.3
N$22
  Top 0.2: TTL-RS3.A 27.16,34.19 54.17,34.19 56.44,31.93 56.44,26.19 59.29,23.34 67.74,23.34 71.14,26.74 71.14,33.22 78.54,40.62 89.34,40.62 91.38,42.65 91.38,63.67 94.01,66.3 94.01,71.81 X5.1
N$23
  Top 0.2: TTL-RS3.B 22.11,33.02 24.59,35.51 54.28,35.51 57.43,32.36 57.43,26.46 59.87,24.02 67.58,24.02 70.5,26.94 70.5,33.81 77.85,41.16 89.04,41.16 90.79,42.9 90.79,64.08 93.33,66.62 93.33,75.79 X5.2
N$24  (via drill 0.3)
  Top 0.203: R14.1 R15.2 111.61,61.85 v111.16,62.29
  Bottom 0.203: v111.16,62.29 111.16,80.57 110.17,81.56 43.79,81.56 41.35,79.12 X4.5
OUT+  (via drill 0.3)
  Top 0.2: D1.C 19.27,16.77 18.8,17.24 18.8,19.75 18.42,20.13 D2.C 14.97,20.13 11.05,24.05 | 11.05,24.05 7.53,24.05 C7.+ | 11.05,24.05 11.05,38.84 10.19,39.69 7.57,39.69 R7.1 | C8.1 107.71,23.36 C6.1 v105.36,24.67 105.36,26.71 104.48,27.59 U2.3 | PZEM-DC3.5V 87.12,62.79 89.86,65.54 89.86,71.12 | 89.86,71.12 ADS2.VDD | 89.89,71.15 89.86,71.12 | PZEM-DC2.5V 136.36,54.24 138.26,54.24 | 138.26,54.24 138.93,54.91 ADS3.VDD | PZEM-DC1.VCC1 144.94,41.18 143.89,42.22 143.89,52.56 142.21,54.24 138.26,54.24 | PZEM-DC1.5V 141.72,6.04 146.71,11.02 ADS1.VDD
  Top 0.203: D1.C 29.75,16.77 31.1,18.12 31.1,30.8 33.57,33.27 53.4,33.27 v53.93,32.74 | ADS1.VDD 150.57,11.02 151.89,12.34 151.89,33.61 149.97,35.53 149.97,41.12 PZEM-DC1.VCC1 | J2.4 95.99,62.6 101.11,67.71 101.11,68.92 PZEM-DC2.VCC1
  Top 0.406: U$1.3V3 U$1.3V3.2
  Bottom 0.203: TTL-RS1.VCC 61.19,59.22 | 61.19,59.22 54.18,59.22 52.02,61.38 | 52.02,61.38 51.95,61.45 51.95,69.02 PZEM-DC3.VCC1 | 52.02,61.38 52.02,48.28 | 52.02,48.28 51.96,48.34 51.96,34.7 v53.93,32.74 53.93,30.06 55.44,28.55 | 52.02,48.28 56.55,43.75 61.24,43.75 TTL-RS2.VCC | 55.44,28.55 55.43,28.55 55.44,28.54 55.44,27.09 48.22,19.87 48.22,6.42 47.09,5.29 47.09,3.74 47.98,2.85 85.85,2.85 90.43,7.43 96.54,7.43 98.9,9.8 98.9,21.05 102.51,24.67 v105.36,24.67 105.37,24.65 107,24.65 122.48,9.17 122.48,5.16 123.45,4.19 134.11,4.19 135.18,5.26 PZEM-DC1.5V | PZEM-DC2.VCC1 101.08,70.49 100.37,71.2 89.85,71.2 ADS2.VDD 89.82,71.96 88.88,72.9 80.27,72.9 79.61,72.23 79.61,71.22 ADS2.ADDR | PZEM-DC3.5V 87.06,54.2 85.18,56.08 64.47,56.08 61.31,59.24 61.21,59.24 61.19,59.22 | 55.44,28.55 61.03,28.55 TTL-RS3.VCC 64.77,28.55 65.82,27.5 65.82,10.11 64.72,9.02 U$1.3V3
RTS  (via drill 0.3)
  Top 0.2: R2.1 v127.77,19.64 Q2.2
  Top 0.203: U1.14 101.47,16.39 101.87,16.8 118.09,16.8 v120.99,19.69
  Bottom 0.203: v120.99,19.69 121.06,19.62 127.76,19.62 v127.77,19.64
RX  (via drill 0.3)
  Top 0.2: 89.04,16.39 U1.3
  Top 0.203: 93.13,16.39 U1.3 96.57,16.39 97.41,17.23 97.41,19.55 95.89,21.07 95.89,36.1 96.83,37.03 104.37,37.03 106.78,34.63 113.77,34.63 115.82,36.67 v115.82,39.71 | v113.19,40.95 U3.35 | D4.C 88.87,16.21 89.04,16.39
  Bottom 0.203: v115.82,39.71 114.58,40.95 v113.19,40.95
RX1  (via drill 0.3)
  Top 0.203: v130.12,53.77 130.12,52.98 129.53,52.39 U3.13
  Bottom 0.203: TTL-RS2.RX 61.91,49.85 65.25,46.52 73.59,46.52 79.35,52.28 88.9,52.28 92.8,56.18 113.32,56.18 114.12,56.98 129.5,56.98 130.12,56.36 v130.12,53.77
RX2  (via drill 0.3)
  Top 0.203: v131.43,48.47 128.33,48.47 U3.10
  Bottom 0.203: TTL-RS3.RX 71.25,34.53 78.81,42.09 89.55,42.09 93.22,38.42 104.24,38.42 117.23,25.43 132.63,25.43 139.54,32.33 139.54,49.8 138.05,51.28 135.11,51.28 132.33,48.51 131.44,48.51 131.43,48.49 v131.43,48.47
RX_PZEM  (via drill 0.3)
  Top 0.203: v113.24,51.2 113.18,51.14 111.23,51.14 U3.27
  Bottom 0.203: TTL-RS1.RX 63.53,65.19 64.14,64.58 64.14,59.16 65.56,57.73 111.43,57.73 112.49,58.8 132.88,58.8 133.47,58.21 133.47,53.17 131.95,51.66 117.67,51.66 114.35,48.34 111.84,48.34 111.26,48.91 111.26,50.64 111.82,51.2 v113.24,51.2
SCK_VSPI  (via drill 0.3)
  Top 0.203: v106.55,43.72 106.57,43.7 106.57,40.87 104.88,39.18 96.41,39.18 93.96,36.74 93.96,25.85 90.62,22.52 86.24,22.52 84.83,21.1 84.83,15.04 83.89,14.1 U$1.SCLK | v109.54,47.3 109.55,47.31 U3.30
  Bottom 0.203: v106.55,43.72 106.55,44.54 109.31,47.3 v109.54,47.3
SCL  (via drill 0.3, 0.35)
  Top 0.203: ADS3.SCL 133.85,72.49 133.07,73.27 105.28,73.27 v105.05,73.04 105.05,70.37 107.16,68.26 107.16,58.64 108.07,57.74 108.07,41.03 109.43,39.66 111.19,39.66 U3.36 | v85.89,64.06 84.74,65.21 ADS2.SCL
  Bottom 0.203: ADS2.SCL 84.74,68.38 86.1,67.03 103.43,67.03 104.2,67.81 104.2,72.19 v105.05,73.04 | ADS1.SCL 146.17,16.1 143.73,18.54 143.73,71.94 142.2,73.47 134.87,73.47 133.85,72.45 ADS3.SCL | J2.2 101.07,63.41 100.42,64.06 v85.89,64.06
SDA  (via drill 0.3)
  Top 0.2: ADS3.ADDR ADS3.SDA
  Top 0.203: U3.33 109.13,43.5 108.62,44.02 108.62,57.45 109.7,58.53 126.73,58.53 128.77,60.58 ADS3.ADDR 128.77,71.74 127.89,72.61 106.86,72.61 v106.04,71.79 | v82.25,63.73 82.2,63.78 ADS2.SDA
  Bottom 0.203: ADS2.SDA 82.2,68.18 84.03,66.36 104.11,66.36 105.27,67.52 105.27,71.02 v106.04,71.79 | ADS1.SDA 146.49,18.64 144.86,20.28 144.86,72.19 142.66,74.39 132.16,74.39 131.31,73.54 ADS3.SDA | J2.3 98.53,62.68 98.15,63.06 82.92,63.06 v82.25,63.73
SS_LAN  (via drill 0.3)
  Top 0.203: v109.55,48.58 U3.29 | v106.44,45.94 106.44,45.92 105.36,44.83 105.36,41.55 103.67,39.86 96.15,39.86 93.36,37.07 93.36,26.14 90.36,23.14 85.83,23.14 84.31,21.63 84.31,17.75 83.2,16.64 U$1.CS
  Bottom 0.203: v109.55,48.58 109.14,48.58 106.5,45.94 v106.44,45.94
TX
  Top 0.203: U3.34 111.27,42.28 113.92,42.28 114.63,41.57 114.63,36.53 113.5,35.4 107.16,35.4 104.73,37.83 96.8,37.83 95.26,36.29 95.26,25.04 92.67,22.45 92.67,18.18 93.16,17.68 | 93.16,17.68 87.12,17.68 86.77,17.32 D3.C | 93.16,17.68 94.53,17.68 U1.2
TX1  (via drill 0.3)
  Top 0.203: v115.3,56.17 115.28,56.15 115.28,54.67 U3.23
  Bottom 0.203: TTL-RS2.TX 63.55,46.85 64.63,45.77 74.01,45.77 79.9,51.66 89.74,51.66 93.39,55.31 114.44,55.31 v115.3,56.17
TX2  (via drill 0.3)
  Top 0.203: v130.67,49.85 U3.11
  Bottom 0.203: TTL-RS3.TX 69.55,31.53 79.51,41.49 89.15,41.49 92.87,37.77 103.78,37.77 117.3,24.25 133.45,24.25 140.79,31.59 140.79,51.06 139.41,52.43 135.04,52.43 132.45,49.85 v130.67,49.85
TX_PZEM  (via drill 0.3)
  Top 0.203: v113.65,50.03 113.47,49.85 U3.28
  Bottom 0.203: TTL-RS1.TX 62.71,62.19 63.23,61.67 63.23,58.49 64.81,56.91 112.18,56.91 112.47,57.21 113.16,57.89 132.42,57.89 132.81,57.5 132.81,53.38 132.13,52.69 117.12,52.69 114.46,50.03 v113.65,50.03
USB_N
  Top 0.203: J1.2 95.35,6.53 96.75,7.93 96.75,12.05 96.21,12.58 U1.6
USB_P
  Top 0.203: J1.3 96,6.68 97.11,7.78 97.11,12.19 96.47,12.83 95.45,13.85 U1.5
VCC  (via drill 0.3, 0.35)
  Top 0.2: R6.1 86.5,7.5 R5.1 | U2.2 99.94,34.25 U2.4 | R4.2 124.05,36.66 125.81,38.42 128.16,38.42 U3.2
  Top 0.203: U2.2 99.94,30.07 108.7,30.07 110.58,28.18 C9.1 | C9.1 110.58,28.34 123.5,41.25 v124.2,41.25 | v129.97,38.41 129.96,38.42 128.16,38.42 | R3.2 123.49,23.38 C9.1 | R5.1 84.84,7.52 84.78,7.58 v84.78,7.58 | v100.21,35.69 100.21,34.52 99.94,34.25
  Bottom 0.203: v124.2,41.25 129.34,41.25 129.97,40.62 v129.97,38.41 | v84.78,7.58 84.78,25.19 83.79,26.18 76.96,26.18 75.85,27.29 75.85,36.81 79.95,40.92 88.67,40.92 92.6,36.98 98.92,36.98 v100.21,35.69
VOLT1+
  Top 0.61: PZEM-DC1.VDC+ 135.22,74.58 134.79,74.15 116.98,74.15 110.49,80.65 35.27,80.65 30.62,76.01 X2.1
VOLT1-
  Top 0.61: PZEM-DC1.VDC- 130.14,78.81 127.11,81.83 30.88,81.83 25.05,76.01 X2.2
VOLT2+
  Top 0.61: PZEM-DC2.VDC+ 63.2,56.87 57.94,56.87 47.62,67.2 29.41,67.2 23.57,73.04 19.71,73.04 19.03,73.73 X2.3
VOLT2-
  Top 0.61: PZEM-DC2.VDC- 64.69,49.06 63.69,50.06 63.69,53.86 62.04,55.5 57.14,55.5 47.15,65.5 29.15,65.5 22.9,71.74 15.83,71.74 13.95,73.62 X2.4
VOLT3+
  Top 0.61: PZEM-DC3.VDC+ 14.66,56.42 14.66,69.53 8.87,75.32 X2.5
VOLT3-
  Top 0.61: PZEM-DC3.VDC- 15.03,49.16 13.23,50.97 13.23,67.78 9.66,71.35 7.1,71.35 3.79,74.67 X2.6
VUSB  (via drill 0.3, 0.35)
  Top 0.2: D2.A v15.2,16.77 14.5,16.77 10.58,20.69 6.31,20.69 5.3,21.71 5.3,27.34 7.57,29.61 C4.+ | 100.81,23.39 C3.2 | 99.91,22.69 v99.91,20.02 99.91,19.06 U1.16
  Top 0.203: J1.1 94.7,5.67 93.93,6.44 v93.65,6.44 | 99.91,22.69 100.61,23.39 100.81,23.39
  Bottom 0.203: v99.91,20.02 v99.91,20.01 99.91,9.8 96.55,6.44 v93.65,6.44 90.52,6.44 86.37,2.29 47.53,2.29 46.49,3.32 46.49,5.67 47.22,6.4 47.22,16.09 46.52,16.79 15.22,16.79 v15.2,16.77